# EAGLE board MotorShieldTestbench_ro (EAGLE 7.7.0)
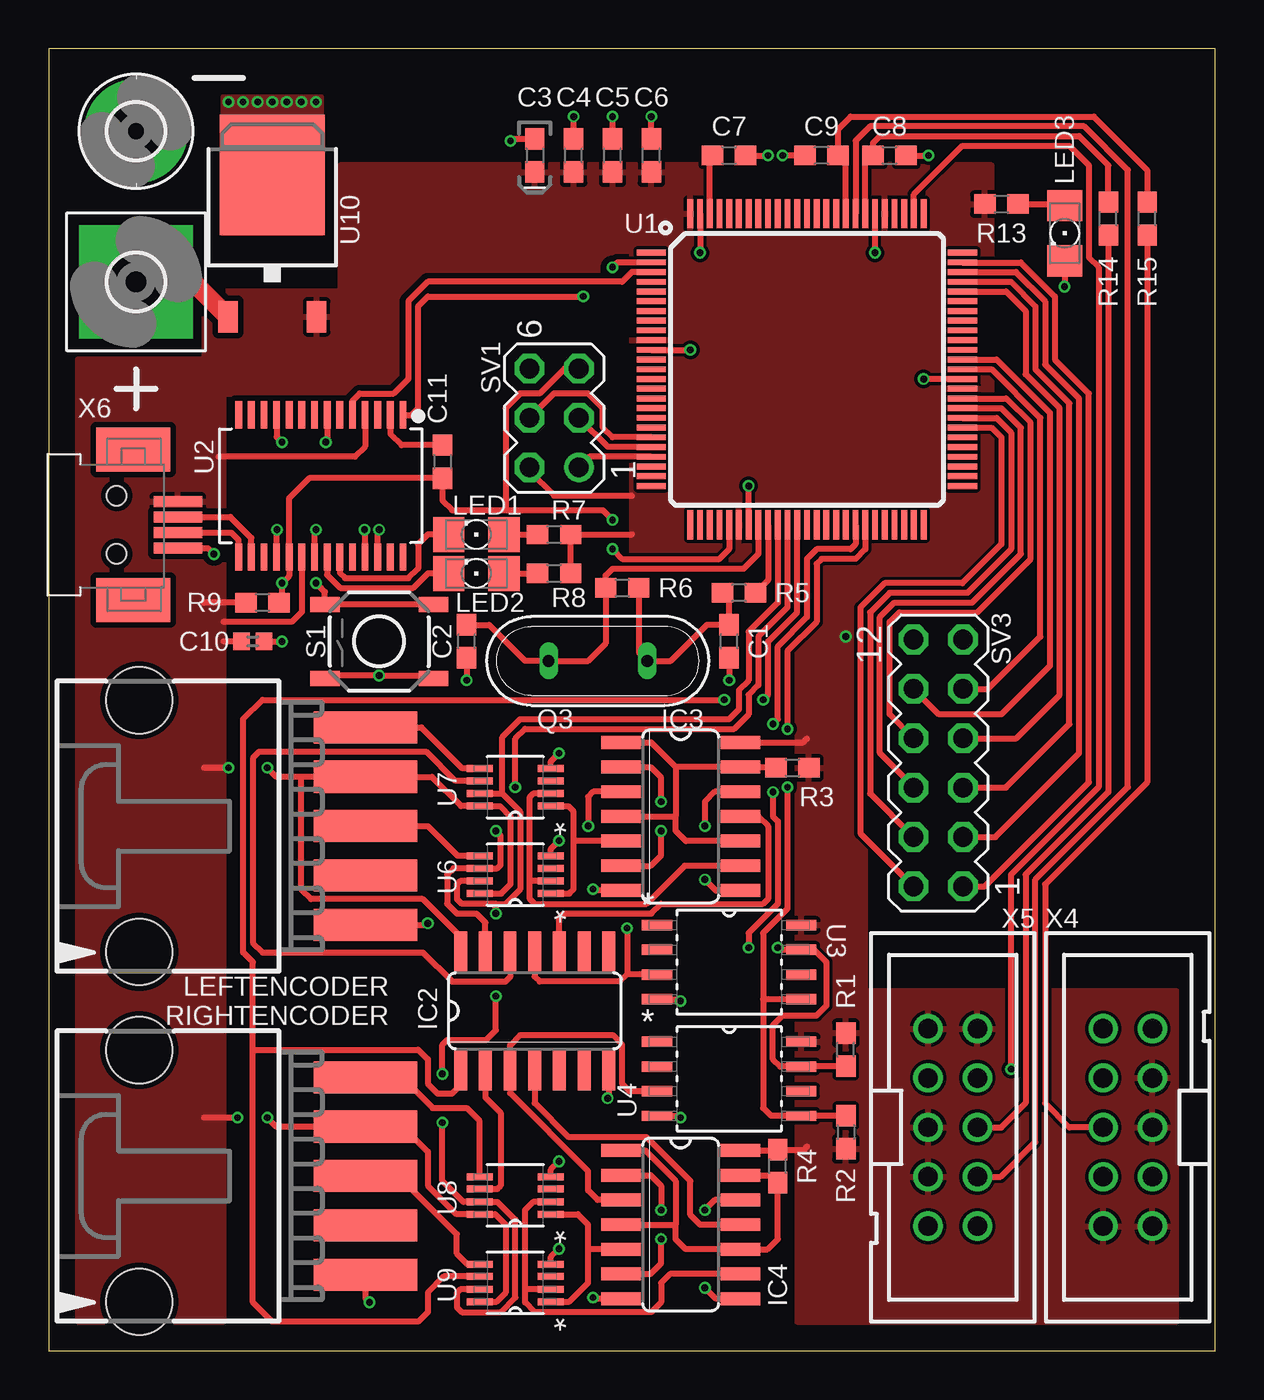
[diagram p0: board, top side]
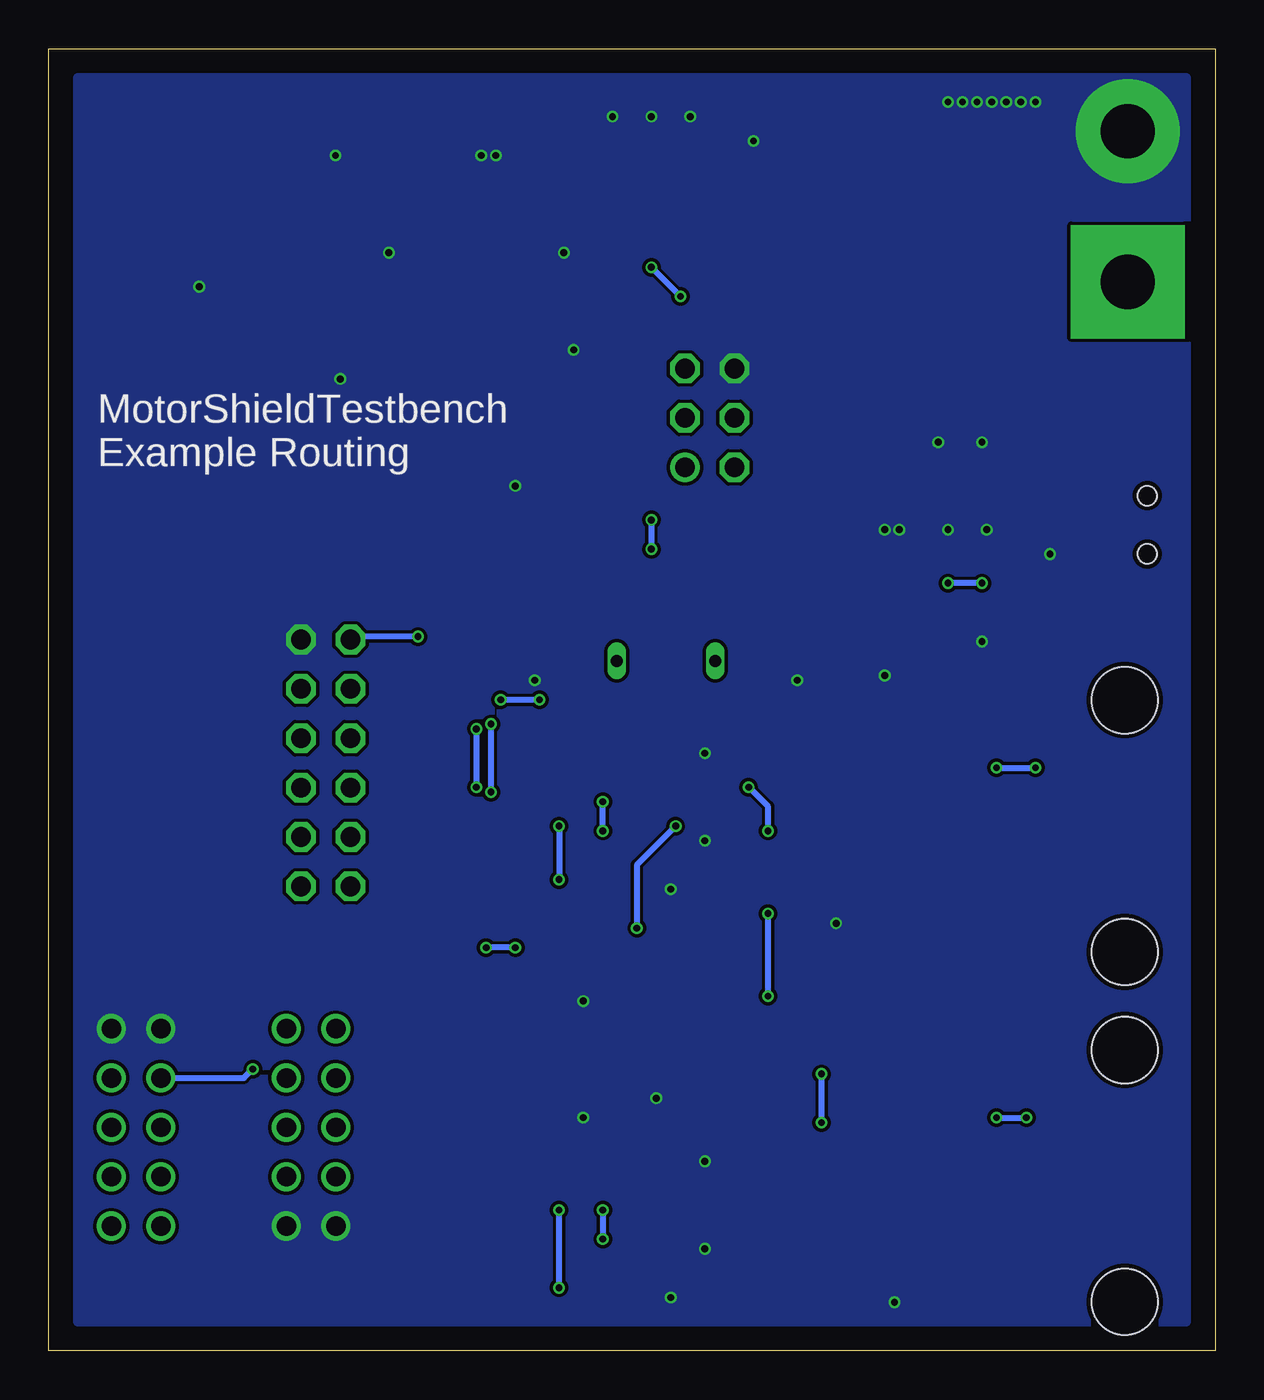
[diagram p1: board, bottom side, seen from below]

Size 60 x 67 mm. Coordinates in mm from the lower left corner, seen from the top.
Outline: 0,0 60,0 60,67 0,67 0,0
Copper layers (1*16): Top 0.035mm / dielectric 1.55mm / Bottom 0.035mm
Design rules "eC_2Layer_PClass6_BaseCopperO35 *": minimum track width 0.15mm, minimum drill 0.35mm, track to track 0.175mm, track to pad 0.175mm, pad to pad 0.175mm, via to via 0.175mm, smd to smd 0mil, copper to edge 0.25mm, drill to drill 0.35mm, minimum pad ring 0.175mm, minimum via ring 0.125mm, stop-mask expansion 0mil, vias tented up to drill 0.45mm, thermal gap 0.2mm

## Footprints (pad centres in the part's own frame; a part is rotated, then mirrored left to right if it is on the bottom)
0603 = smd 1.1 x 1: 1 -0.85,0; 2 0.85,0
0603-POLAR = smd 1.1 x 1: + 0.85,0; - -0.85,0
0402 = smd 0.85 x 0.9: 1 -0.58,0; 2 0.58,0
2,8-PAD = drill 2.8 pad 5.334: B2,8 0,0
2,8-PAD-SQUARE = drill 2.8 pad 5.842 square: B2,8 0,0
SO14 = smd 0.66 x 2.032: 1 -3.81,-3.073; 2 -2.54,-3.073; 3 -1.27,-3.073; 4 0,-3.073; 5 1.27,-3.073; 6 2.54,-3.073; 7 3.81,-3.073; 8 3.81,3.073; 9 2.54,3.073; 10 1.27,3.073; 11 0,3.073; 12 -1.27,3.073; 13 -2.54,3.073; 14 -3.81,3.073
LED_1206 = smd 1.6 x 1.803: A -1.422,0; C 1.422,0
15-91-05 = smd 1.651 x 5.334: 1 -5.08,-10.795; 2 -2.54,-10.795; 3 0,-10.795; 4 2.54,-10.795; 5 5.08,-10.795 | hole 3.404: -6.477,0.838; 6.477,0.838
QS = drill 0.61 long: 1 -2.54,0; 2 2.54,0
TACTILE_SWITCH_SMD_5.2MM = smd 1.524 x 0.762: 1 -2.794,1.905; 2 2.794,1.905; 3 -2.794,-1.905; 4 2.794,-1.905
MA03-2 = drill 1.016: 1 -2.54,-1.27 | drill 1.016 octagon: 2 -2.54,1.27; 3 0,-1.27; 4 0,1.27; 5 2.54,-1.27; 6 2.54,1.27
MA06-2 = drill 1.016 octagon: 1 -6.35,-1.27; 2 -6.35,1.27; 3 -3.81,-1.27; 4 -3.81,1.27; 5 -1.27,-1.27; 6 -1.27,1.27; 7 1.27,-1.27; 8 1.27,1.27; 9 3.81,-1.27; 10 3.81,1.27; 11 6.35,-1.27; 12 6.35,1.27
TQFP100 = smd 1.5 x 0.3: 1 -8,6; 2 -8,5.5; 3 -8,5; 4 -8,4.5; 5 -8,4; 6 -8,3.5; 7 -8,3; 8 -8,2.5; 9 -8,2; 10 -8,1.5; 11 -8,1; 12 -8,0.5; 13 -8,0; 14 -8,-0.5; 15 -8,-1; 16 -8,-1.5; 17 -8,-2; 18 -8,-2.5; 19 -8,-3; 20 -8,-3.5; 21 -8,-4; 22 -8,-4.5; 23 -8,-5; 24 -8,-5.5; 25 -8,-6; 51 8,-6; 52 8,-5.5; 53 8,-5; 54 8,-4.5; 55 8,-4; 56 8,-3.5; 57 8,-3; 58 8,-2.5; 59 8,-2; 60 8,-1.5; 61 8,-1; 62 8,-0.5; 63 8,0; 64 8,0.5; 65 8,1; 66 8,1.5; 67 8,2; 68 8,2.5; 69 8,3; 70 8,3.5; 71 8,4; 72 8,4.5; 73 8,5; 74 8,5.5; 75 8,6 | smd 0.3 x 1.5: 26 -6,-8; 27 -5.5,-8; 28 -5,-8; 29 -4.5,-8; 30 -4,-8; 31 -3.5,-8; 32 -3,-8; 33 -2.5,-8; 34 -2,-8; 35 -1.5,-8; 36 -1,-8; 37 -0.5,-8; 38 0,-8; 39 0.5,-8; 40 1,-8; 41 1.5,-8; 42 2,-8; 43 2.5,-8; 44 3,-8; 45 3.5,-8; 46 4,-8; 47 4.5,-8; 48 5,-8; 49 5.5,-8; 50 6,-8; 76 6,8; 77 5.5,8; 78 5,8; 79 4.5,8; 80 4,8; 81 3.5,8; 82 3,8; 83 2.5,8; 84 2,8; 85 1.5,8; 86 1,8; 87 0.5,8; 88 0,8; 89 -0.5,8; 90 -1,8; 91 -1.5,8; 92 -2,8; 93 -2.5,8; 94 -3,8; 95 -3.5,8; 96 -4,8; 97 -4.5,8; 98 -5,8; 99 -5.5,8; 100 -6,8
SSOP28DB = smd 0.348 x 1.397: 1 -4.225,-3.656; 2 -3.575,-3.656; 3 -2.925,-3.656; 4 -2.275,-3.656; 5 -1.625,-3.656; 6 -0.975,-3.656; 7 -0.325,-3.656; 8 0.325,-3.656; 9 0.975,-3.656; 10 1.625,-3.656; 11 2.275,-3.656; 12 2.925,-3.656; 13 3.575,-3.656; 14 4.225,-3.656; 15 4.225,3.656; 16 3.575,3.656; 17 2.925,3.656; 18 2.275,3.656; 19 1.625,3.656; 20 0.975,3.656; 21 0.325,3.656; 22 -0.325,3.656; 23 -0.975,3.656; 24 -1.625,3.656; 25 -2.275,3.656; 26 -2.925,3.656; 27 -3.575,3.656; 28 -4.225,3.656
SOIC127P798X216-8N = smd 1.549 x 0.533: 1 -3.708,1.905; 2 -3.708,0.635; 3 -3.708,-0.635; 4 -3.708,-1.905; 5 3.708,-1.905; 6 3.708,-0.635; 7 3.708,0.635; 8 3.708,1.905
SOP65P400X130-8N = smd 1.321 x 0.356: 1 -1.829,0.965; 2 -1.829,0.33; 3 -1.829,-0.33; 4 -1.829,-0.965; 5 1.829,-0.965; 6 1.829,-0.33; 7 1.829,0.33; 8 1.829,0.965
TO-252 = smd 1 x 1.6: 1 -2.28,-4.8; 2 2.28,-4.8 | smd 5.4 x 6.2: 3 0,2.5
PAK100/2500-10 = drill 1 pad 1.422: 1 -5.08,-1.27; 2 -5.08,1.27; 3 -2.54,-1.27; 4 -2.54,1.27; 5 0,-1.27; 6 0,1.27; 7 2.54,-1.27; 8 2.54,1.27; 9 5.08,-1.27; 10 5.08,1.27
32005-101 = smd 2.5 x 0.55: 1 3.15,1.2; 2 3.15,0.4; 3 3.15,-0.4; 4 3.15,-1.2 | smd 3.8 x 2.25: M1 0.85,3.875; M2 0.85,-3.875 | hole 1: 0,1.5; 0,-1.5

## Placement (x,y rotation side)
C1  22pF  [0603]  35,36.5 90 top
C2  22pF  [0603]  21.5,36.5 90 top
C3  10uF  [0603-POLAR]  25,61.5 270 top
C4  0.1uF  [0603]  27,61.5 90 top
C5  0.1uF  [0603]  29,61.5 90 top
C6  0.1uF  [0603]  31,61.5 90 top
C7  0.1uF  [0603]  35,61.5 0 top
C8  10uF  [0603]  43.25,61.5 0 top
C9  10uF  [0603]  39.75,61.5 180 top
C10  0.1uF  [0402]  10.5,36.5 0 top
C11  0.1uF  [0603]  20.25,45.75 270 top
H1  MOUNT-PAD-ROUND2.8  [2,8-PAD]  4.5,62.75 0 top
H2  MOUNT-PAD-SQUARE2.8  [2,8-PAD-SQUARE]  4.5,55 0 top
IC2  74LS04D  [SO14]  25,17.5 0 top
IC3  74AC74D  [SO14]  32.5,27.5 270 top
IC4  74AC74D  [SO14]  32.5,6.5 270 top
LED1  [LED_1206]  22,42 180 top
LED2  [LED_1206]  22,40 180 top
LED3  [LED_1206]  52.25,57.5 270 top
LEFTENCODER  C-GRID-05-15-91  [15-91-05]  5.5,27 90 top
Q3  [QS]  28.25,35.5 180 top
R1  10k  [0603]  41,15.5 90 top
R2  10k  [0603]  41,11.25 270 top
R3  10k  [0603]  38.25,30 0 top
R4  10k  [0603]  37.5,9.5 90 top
R5  27  [0603]  35.5,39 180 top
R6  1M  [0603]  29.5,39.25 180 top
R7  1k  [0603]  26,42 0 top
R8  1k  [0603]  26,40 0 top
R9  10k  [0603]  11,38.5 180 top
R13  1k  [0603]  49,59 180 top
R14  47k  [0603]  54.5,58.25 90 top
R15  47k  [0603]  56.5,58.25 90 top
RIGHTENCODER  C-GRID-05-15-91  [15-91-05]  5.5,9 90 top
S1  MOMENTARY-SWITCH-SPST-SMD-5.2-REDUNDANT  [TACTILE_SWITCH_SMD_5.2MM]  17,36.5 180 top
SV1  [MA03-2]  26,48 90 top
SV3  [MA06-2]  45.75,30.25 90 top
U1  ATMEGA2560AU  [TQFP100]  39,50.5 0 top
U2  FT232RL  [SSOP28DB]  14,44.5 180 top
U3  ATTINY85-20SU  [SOIC127P798X216-8N]  35,20 0 top
U4  ATTINY85-20SU  [SOIC127P798X216-8N]  35,14 0 top
U6  SN74LVC2G157DCTR  [SOP65P400X130-8N]  24,24.5 180 top
U7  SN74LVC2G157DCTR  [SOP65P400X130-8N]  24,29 180 top
U8  SN74LVC2G157DCTR  [SOP65P400X130-8N]  24,8 180 top
U9  SN74LVC2G157DCTR  [SOP65P400X130-8N]  24,3.5 180 top
U10  +12v  [TO-252]  11.5,58 0 top
X4  2510-  [PAK100/2500-10]  55.5,11.5 90 top
X5  2510-  [PAK100/2500-10]  46.5,11.5 270 top
X6  MINI-USB_4P-32005-101  [32005-101]  3.5,42.5 0 top

## Library data of the parts
C1 C2 = SparkFun-Capacitors; PROD_ID: CAP-07876
C3 = SparkFun-Capacitors; PROD_ID: CAP-13210
C4-C7 C11 = SparkFun-Capacitors; PROD_ID: CAP-00810
C8 C9 = SparkFun-Capacitors; PROD_ID: CAP-11015
C10 = SparkFun-Capacitors; PROD_ID: CAP-12416
H1 H2 = holes
IC2-IC4 = 74xx-eu
LED1-LED3 = eagle-ltspice; SPICEMODEL: NONE; SPICEPREFIX: D; SPICETYPE: diode
LEFTENCODER RIGHTENCODER = con-molex; OC_FARNELL: unknown; OC_NEWARK: unknown
Q3 = special
R1-R4 R9 = SparkFun-Resistors; PROD_ID: RES-00824
R5 = SparkFun-Resistors; PROD_ID: RES-09334
R6 = SparkFun-Resistors; PROD_ID: RES-07868
R7 R8 R13 = SparkFun-Resistors; PROD_ID: RES-07856
R14 R15 = SparkFun-Resistors; PROD_ID: RES-07871
S1 = SparkFun-Switches; PROD_ID: SWCH-08247; SF_SKU: COM-08720
SV1 SV3 = con-lstb; OC_FARNELL: unknown; OC_NEWARK: unknown
U1 = SparkFun-IC-Microcontroller; PROD_ID: IC-10040
U2 = SparkFun-IC-Comms; PROD_ID: IC-00870
U3 U4 = Atmel_By_element14_Batch_1-00; MPN: ATTINY85-20SU; OC_FARNELL: 1455164; OC_NEWARK: 58M3797; PACKAGE: SOIC-8; SUPPLIER: Atmel
U6-U9 = Texas Instruments_By_element14_Batch_1; MPN: SN74LVC2G157DCTR; OC_FARNELL: 1287414; OC_NEWARK: 76C4205; PACKAGE: SOP-8; SUPPLIER: Texas Instruments
U10 = SparkFun-IC-Power; PROD_ID: VREG-12370
X4 X5 = con-3m; MF: 3M; MPN: 2510-6002UB; OC_FARNELL: 9838244; OC_NEWARK: 46F4725
X6 = con-cypressindustries; OC_FARNELL: unknown; OC_NEWARK: unknown

## Nets
+5V: C3.+ C4.1 C5.1 C6.1 C10.1 IC2.14 IC3.14 IC4.14 LEFTENCODER.4 R1.2 R2.2 R3.2 R4.2 R7.2 R8.2 R9.2 R13.2 RIGHTENCODER.4 SV1.2 SV3.12 U1.10 U1.31 U1.61 U1.80 U1.100 U2.4 U2.20 U3.8 U4.8 U6.8 U7.8 U8.8 U9.8 U10.2 X4.1 X4.2 X4.5 X4.7 X5.1 X5.2 X5.5 X5.7 X6.1
D+: U2.15 X6.3
D-: U2.16 X6.2
DTR: C11.1 U2.2
GND: C1.1 C2.1 C3.- C4.2 C5.2 C6.2 C7.2 C8.2 C9.2 C10.2 H1.B2,8 IC2.7 IC3.7 IC4.7 LED3.C LEFTENCODER.1 RIGHTENCODER.1 S1.1 S1.2 SV1.6 SV3.11 U1.11 U1.32 U1.62 U1.81 U1.99 U2.7 U2.11 U2.18 U2.21 U2.25 U2.26 U3.4 U4.4 U6.4 U7.4 U8.4 U9.4 U10.3 X4.9 X4.10 X5.9 X5.10 X6.4
LDIR: U1.83 X5.8
LE1: LEFTENCODER.3 U6.5
LE2: LEFTENCODER.5 U7.5
LSELECT: IC2.13 U1.36 U6.6
LSPEED: C8.1 R14.2 U1.82
LSPEEDH: R14.1 X5.6
LWAVE: IC2.11 IC3.3 U3.3
LWAVE1: IC3.5 U6.1 U7.1
LWAVE2: IC3.9 U6.2 U7.2
MISO: SV1.1 U1.22
MOSI: SV1.3 U1.21
N$1: IC3.2 IC3.6
N$3: IC2.2 U8.6
N$4: IC3.8 IC3.12
N$5: IC4.2 IC4.6
N$6: IC4.8 IC4.12
N$8: IC2.12 U7.6
N$9: IC4.1 IC4.4 IC4.10 IC4.13 R4.1
N$10: IC3.1 IC3.4 IC3.10 IC3.13 R3.1
N$14: IC2.4 IC4.11
N$22: R5.1 U1.34
N$24: C2.2 Q3.2 R6.2 U1.33
N$27: IC2.10 IC3.11
N$33: H2.B2,8 U10.1
N$36: C7.1 U1.98
N$37: LED1.A R7.1
N$38: LED2.A R8.1
N$47: LED3.A R13.1
N$63: C1.2 Q3.1 R5.2 R6.1
OA1: SV3.8 U1.60
OA2: SV3.6 U1.59
OA3: SV3.4 U1.58
OA4: SV3.2 U1.57
OD1: SV3.7 U1.71
OD2: SV3.5 U1.72
OD3: SV3.3 U1.73
OD4: SV3.1 U1.74
ORXM: SV3.9 U1.63
OTXM: SV3.10 U1.64
RDIR: U1.77 X4.8
RE1: RIGHTENCODER.3 U9.5
RE2: RIGHTENCODER.5 U8.5
RESET: C11.2 R9.1 S1.3 S1.4 SV1.5 U1.30 U2.19
RSELECT: IC2.1 U1.37 U9.6
RSPEED: C9.1 R15.2 U1.84
RSPEEDH: R15.1 X4.6
RWAVE: IC2.3 IC4.3 U4.3
RWAVE1: IC4.5 U8.1 U9.1
RWAVE2: IC4.9 U8.2 U9.2
RXLED: LED2.C U2.22
RXM: U1.2 U2.1
SCK: SV1.4 U1.20
SCL: R1.1 U1.43 U3.7 U4.7
SDA: R2.1 U1.44 U3.5 U4.5
STOP: U1.35 U6.7 U7.7 U8.7 U9.7
TXLED: LED1.C U2.23
TXM: U1.3 U2.5

## Tracks (layer width: path | path; a pad name or v marks a point on that pad's centre or on a via)
+5V  (via drill 0.35)
  Top 0.3: U6.8 23.29,23.54 23.75,24 23.75,27.5 23.21,28.04 U7.8 21.21,28.04 19.71,29.54 LEFTENCODER.4 13,29.54 | RIGHTENCODER.4 | U9.8 23.04,2.54 23.5,3 23.5,6.5 22.96,7.04 U8.8 20.96,7.04 19.5,8.5 19.5,10.25 18.21,11.54 RIGHTENCODER.4 | IC4.14 37.46,10.31 R4.2 38.85,10.35 39,10.5 | SV1.2 24.73,45.27 26,44 30,44 | R8.2 R7.2 30,42 | 13,29.54 11.71,29.54 v11.25,30 | v9.25,30 8,30 | RIGHTENCODER.4 11.71,11.54 v11.25,12 | v9.71,12 8,12 | R9.2 8,38.5 | IC3.14 38.81,31.31 39,31.5 | U2.4 16.27,46.52 15.75,46 8.75,46 | C10.1 9,36.5 | IC2.14 21.19,21.31 19.25,23.25 13.5,23.25 13,23.75 13,29.54 | U2.20 13.03,38.02 12.5,37.5 9,37.5
  Bottom 0.3: v11.25,30 v9.25,30 | v11.25,12 v9.71,12 | v41,36.75 44.33,36.75 SV3.12
  pour Top (isolate 0.3): 1.5,1.5 9,1.5 9,49.25 19.5,49.25 19.5,55.5 31,55.5 31,61 15,61 15,54.5 8,54.5 8,51 1.5,51
  pour Top: 30,40.5 38.5,40.5 38.5,1.5 58,1.5 58,18.5 42,18.5 42,38.5 48.5,38.5 48.5,61 30,61
D+
  Top 0.3: X6.3 9.4,42.1 9.78,41.73 U2.15
D-
  Top 0.3: X6.2 9.35,42.9 10.43,41.83 U2.16
DTR
  Top 0.3: U2.2 17.57,47.17 18.15,46.6 C11.1
GND  (via drill 0.35)
  Top 0.3: U2.18 11.72,42.23 v11.75,42.25 | U2.21 13.68,42.17 v13.75,42.25 | U2.25 16.27,42.23 v16.25,42.25 | U2.26 16.93,42.17 v17,42.25 | X6.4 8.2,41.3 v8.5,41 | LEFTENCODER.1 19.42,21.92 v19.5,22 | U3.4 32.41,18.09 v32.5,18 | U4.4 32.41,12.1 v32.5,12 | IC2.7 28.81,13.06 v28.75,13 | C2.1 v21.5,34.5 | C1.1 v35,34.5 | U1.11 v33,51.5 | U1.99 v33.5,56.5 | U1.81 v42.5,56.5 | U1.62 v45,50 | U1.32 v36,44.5 | LED3.C v52.25,54.75 | C4.2 v27,63.5 | C5.2 v29,63.5 | C6.2 v31,63.5 | C7.2 v37,61.5 | C3.- 23.85,62.35 v23.75,62.25 | U8.4 25.83,9.33 v26.25,9.75 | U9.4 25.83,4.83 v26.25,5.25 | IC4.7 28.06,2.69 v28,2.75 | C10.2 v12,36.5 | IC3.7 28.06,23.69 v28,23.75 | RIGHTENCODER.1 16.3,2.71 v16.5,2.5 | U7.4 25.83,30.33 v26.25,30.75 | U6.4 25.83,25.83 v26.25,26.25 | C9.2 v37.75,61.5 | C8.2 v45.25,61.5 | U2.11 11.72,47.02 v12,46.75 | U2.7 14.32,46.83 v14.25,46.75 | S1.1 19.64,34.75 v17,34.75 14.36,34.75 S1.2
  other vias: 9.25,64.25 10,64.25 13,64.25 13.75,64.25 12.25,64.25 10.75,64.25 11.5,64.25
  pour Bottom (no thermals): 58.5,1.5 1.5,1.5 1.5,65.5 58.5,65.5
  pour Top (no thermals): 9,64.5 14,64.5 14,57.5 9,57.5
LDIR
  Top 0.3: X5.8 48.96,8.96 50.75,10.75 50.75,24.25 55.5,29 55.5,60.75 53.25,63 42.25,63 41.5,62.25 U1.83
LE1
  Top 0.3: LEFTENCODER.3 19.5,27 21.04,25.46 U6.5
LE2
  Top 0.3: U7.5 21.29,29.96 19.17,32.08 LEFTENCODER.5
LSELECT  (via drill 0.35)
  Top 0.3: IC2.13 22.46,22.04 22,22.5 21,22.5 20.5,23 20.5,24.5 20.83,24.83 U6.6 23.08,24.83 23.25,25 23.25,26.5 v23,26.75 | v24,29 24,31.5 24.5,32 35.25,32 36,32.75 36,33.75 36.5,34.25 36.5,36.75 38,38.25 U1.36
  Bottom 0.3: v23,26.75 23,28 v24,29
LSPEED
  Top 0.3: U1.82 42,61.1 C8.1 42.4,62.15 42.75,62.5 53,62.5 54.5,61 R14.2
LSPEEDH
  Top 0.3: R14.1 54.5,28.75 50.25,24.5 50.25,12.75 49,11.5 X5.6
LWAVE  (via drill 0.35)
  Top 0.3: IC2.11 25,19.25 25.25,19 29.39,19 29.75,19.36 | U3.3 29.75,19.36 | IC3.3 28.02,28.77 27.75,28.5 v27.75,27 | v29.75,21.75 29.75,19.36
  Bottom 0.3: v27.75,27 29.75,25 v29.75,21.75
LWAVE1
  Top 0.3: U7.1 26.71,28.04 27,27.75 27,26.23 | IC3.5 27,26.23 | U6.1 26.79,23.54 27,23.75 27,26.23
LWAVE2
  Top 0.3: U7.2 24.92,28.67 24.75,28.5 24.75,24.17 | 24.75,24.17 24.75,23.25 25,23 30.75,23 32.71,24.96 IC3.9 | U6.2 24.75,24.17
MISO
  Top 0.3: U1.22 27.81,46 SV1.1
MOSI
  Top 0.3: U1.21 28.77,46.5 SV1.3
N$1  (via drill 0.35)
  Top 0.3: IC3.6 30.96,24.96 31.5,25.5 v31.5,26.75 | IC3.2 30.96,30.04 31.5,29.5 v31.5,28.25
  Bottom 0.3: v31.5,26.75 v31.5,28.25
N$3
  Top 0.3: IC2.2 22.46,13.04 23.25,12.25 23.25,8.5 23.08,8.33 U8.6
N$4  (via drill 0.35)
  Top 0.3: IC3.8 34.31,23.69 v33.75,24.25 | IC3.12 34.27,28.77 33.75,28.25 v33.75,27
  Bottom 0.3: v33.75,27 v33.75,24.25
N$5  (via drill 0.35)
  Top 0.3: IC4.6 30.96,3.96 31.5,4.5 v31.5,5.75 | IC4.2 30.96,9.04 31.5,8.5 v31.5,7.25
  Bottom 0.3: v31.5,7.25 v31.5,5.75
N$6  (via drill 0.35)
  Top 0.3: IC4.8 34.31,2.69 v33.75,3.25 | IC4.12 34.27,7.77 v33.75,7.25
  Bottom 0.3: v33.75,3.25 v33.75,7.25
N$8
  Top 0.3: IC2.12 23.73,19.23 23.5,19 20.75,19 19.25,20.5 11,20.5 10.5,21 10.5,30.5 10.83,30.83 19.42,30.83 20.92,29.33 U7.6
N$9
  Top 0.3: IC4.4 32.25,6.5 | IC4.1 30.69,10.31 32.25,8.75 32.25,6.5 | 32.25,6.5 32.25,5.75 32.77,5.23 IC4.10 36.98,5.23 37.5,5.75 R4.1 37.11,9.04 IC4.13
N$10
  Top 0.3: IC3.4 32.25,27.5 | IC3.1 30.98,31.31 32.25,30.04 | 32.25,30.04 32.25,27.5 | IC3.10 32.77,26.23 32.25,26.75 32.25,27.5 | R3.1 37.36,30.04 IC3.13 32.25,30.04
N$14
  Top 0.3: IC4.11 33.5,6.5 33,7 33,8.75 30.75,11 26.75,11 25,12.75 IC2.4
N$22
  Top 0.3: U1.34 37,39.65 R5.1
N$24
  Top 0.3: C2.2 22.65,37.35 24.5,35.5 Q3.2 27.75,35.5 28.65,36.4 R6.2 28.65,39.9 29,40.25 35.75,40.25 36.5,41 U1.33
N$27
  Top 0.3: IC2.10 26.27,22.27 26.5,22.5 31,22.5 31.5,23 36.75,23 37,23.25 37,27 36.5,27.5 IC3.11
N$33
  Top 1: H2.B2,8 7.42,55 U10.1
N$36
  Top 0.3: U1.98 34,61.35 C7.1
N$37
  Top 0.3: LED1.A R7.1
N$38
  Top 0.3: LED2.A R8.1
N$47
  Top 0.3: R13.1 52.17,59 LED3.A
N$63
  Top 0.3: R6.1 30.35,35.94 Q3.1 32,35.5 33.85,37.35 C1.2 35,38.65 R5.2
OA1
  Top 0.3: U1.60 49.25,49 50.5,47.75 50.5,40.75 47.75,38 43.75,38 43.25,37.5 43.25,32.75 SV3.8
OA2
  Top 0.3: U1.59 49,48.5 50,47.5 50,41 47.5,38.5 43.5,38.5 42.75,37.75 42.75,30.75 44.23,29.27 SV3.6
OA3
  Top 0.3: U1.58 48.75,48 49.5,47.25 49.5,41.25 47.25,39 43.25,39 42.25,38 42.25,28.67 SV3.4
OA4
  Top 0.3: U1.57 48.5,47.5 49,47 49,41.5 47,39.5 43,39.5 41.75,38.25 41.75,26.63 SV3.2
OD1
  Top 0.3: U1.71 49.25,54.5 50.25,53.5 50.25,50.25 52,48.5 52,33.75 49.77,31.52 SV3.7
OD2
  Top 0.3: U1.72 49.5,55 50.75,53.75 50.75,50.5 52.5,48.75 52.5,32.25 49.23,28.98 SV3.5
OD3
  Top 0.3: U1.73 49.75,55.5 51.25,54 51.25,50.75 53,49 53,30.75 48.69,26.44 SV3.3
OD4
  Top 0.3: U1.74 50,56 51.75,54.25 51.75,51 53.5,49.25 53.5,29.25 48.15,23.9 SV3.1
ORXM
  Top 0.3: U1.63 48.5,50.5 51,48 51,36.75 48.31,34.06 SV3.9
OTXM
  Top 0.3: U1.64 48.75,51 51.5,48.25 51.5,35.25 49,32.75 45.79,32.75 SV3.10
RDIR  (via drill 0.35)
  Top 0.3: U1.77 44.5,59.5 47,62 52.5,62 53.5,61 53.5,56.25 54,55.75 54,29 49.5,24.5 v49.5,14.5
  Bottom 0.3: X4.8 49.96,14.04 v49.5,14.5
RE1
  Top 0.3: RIGHTENCODER.3 16.33,8.96 18.04,8.96 21,6 21,5 21.54,4.46 U9.5
RE2
  Top 0.3: RIGHTENCODER.5 18.42,14.08 18.42,13.83 19.75,12.5 21.5,12.5 22.17,11.83 U8.5
RESET  (via drill 0.35)
  Top 0.3: 23.5,43.25 20.75,43.25 20.25,43.75 C11.2 13.4,44.9 12.38,43.88 U2.19 12.38,39.88 v12,39.5 12,38.65 R9.1 | 23.5,43.25 28.5,43.25 v29,42.75 | SV1.5 26.54,50.54 25.25,49.25 24.25,49.25 23.5,48.5 23.5,43.25 | v29,41.25 29.5,40.75 34.5,40.75 35,41.25 U1.30 | 14,39.25 v13.75,39.5 14.21,39.04 S1.4 S1.3
  Bottom 0.3: v29,42.75 v29,41.25 | v12,39.5 v13.75,39.5
RSELECT  (via drill 0.35)
  Top 0.3: 10.5,15.5 19,15.5 19.5,15 19.5,13.75 20,13.25 20.75,13.25 21.19,13.69 IC2.1 | U9.6 20.33,3.83 19.5,3 19.5,2 19,1.5 11.5,1.5 10.5,2.5 10.5,15.5 | 10.5,15.5 10.5,20 10,20.5 10,32.5 11,33.5 v34.75,33.5 | v36.75,33.5 37,33.75 37,36.5 38.5,38 U1.37
  Bottom 0.3: v34.75,33.5 v36.75,33.5
RSPEED
  Top 0.3: U1.84 41,61.1 C9.1 40.6,62.85 41.25,63.5 53.75,63.5 56.5,60.75 R15.2
RSPEEDH
  Top 0.3: R15.1 56.5,29.25 51.25,24 51.25,12.75 52.5,11.5 X4.6
RWAVE
  Top 0.3: IC4.3 28.23,7.77 27.75,8.25 27.75,9.25 23.73,13.27 IC2.3 23.73,15.73 24.25,16.25 29,16.25 29.5,15.75 29.5,13.75 29.89,13.37 U4.3
RWAVE1
  Top 0.3: U9.1 26.79,2.54 27.75,3.5 27.75,5.23 | 27.75,5.23 27.75,6.5 27.21,7.04 U8.1 | IC4.5 27.75,5.23
RWAVE2
  Top 0.3: U8.2 24.92,7.67 24.5,7.25 24.5,3.17 | IC4.9 31.96,3.96 31.5,3.5 31.5,2.5 31,2 25,2 24.5,2.5 24.5,3.17 | U9.2 24.5,3.17
RXLED
  Top 0.3: U2.22 14.32,39.92 15,39.25 18.75,39.25 19.5,40 LED2.C
RXM  (via drill 0.35)
  Top 0.3: U2.1 18.66,48.16 19,48.5 19,53.75 19.5,54.25 v27.5,54.25 | U1.2 29.25,56 v29,55.75
  Bottom 0.3: v27.5,54.25 v29,55.75
SCK
  Top 0.3: U1.20 29,47 28.5,47.5 28.5,48.5 27.75,49.25 25.98,49.25 SV1.4
SCL  (via drill 0.35)
  Top 0.3: U1.43 41.5,41.5 41.25,41.25 39.5,41.25 39,40.75 39,37.75 37.5,36.25 37.5,32.5 v37.25,32.25 | v37.25,28.75 37.25,27.5 37.5,27.25 37.5,23 36,21.5 v36,20.75 | R1.1 38.72,14.65 U4.7 37.62,14.63 37.25,15 37.25,16.75 37.75,17.25 39.5,17.25 40,17.75 40,20 39.37,20.64 U3.7 37.62,20.64 v37.5,20.75
  Bottom 0.3: v37.25,32.25 v37.25,28.75 | v36,20.75 v37.5,20.75
SDA  (via drill 0.35)
  Top 0.3: U3.5 36.75,18.09 | 36.75,18.09 36.75,12.5 37.16,12.1 U4.5 R2.1 | U1.44 42,41.25 41.5,40.75 39.75,40.75 39.5,40.5 39.5,37.5 38,36 v38,32 | v38,29 38,22.75 36.75,21.5 36.75,18.09
  Bottom 0.3: v38,32 v38,29
STOP  (via drill 0.35)
  Top 0.3: 23,23 21.25,23 21,23.25 21,24 21.17,24.17 U6.7 | U9.7 21.17,3.17 21,3 21,2.25 21.25,2 23.25,2 24,2.75 24,6.75 23.08,7.67 U8.7 21.33,7.67 20.25,8.75 v20.25,11.75 | U7.7 23.33,28.67 | 23.33,28.67 24.25,27.75 24.25,23.75 23.5,23 23,23 | 23.33,28.67 23.33,31.58 24.25,32.5 35,32.5 35.5,33 35.5,34 36,34.5 36,37 37.5,38.5 U1.35 | v20.25,14.25 20.25,15.75 20.5,16 22.5,16 23,16.5 v23,18.25 | v23,22.5 23,23
  Bottom 0.3: v23,18.25 v23,22.5 | v20.25,11.75 v20.25,14.25
TXLED
  Top 0.3: U2.23 14.97,40.02 15.25,39.75 18.5,39.75 19,40.25 19,41.5 19.5,42 LED1.C
TXM
  Top 0.3: U1.3 30,55.5 29.5,55 19.5,55 18.5,54 18.5,50 17.75,49.25 16,49.25 15.62,48.88 U2.5

## Text on the board
bPlace: MotorShieldTestbench / Example Routing